# Altium PCB KEY_PLC1.PcbDoc
Units mm, origin at the board's own origin, x right, y up, seen from the top; angles counter-clockwise.
Board outline 189.8 x 21.8 mm, 2 copper layers (Top Layer, Bottom Layer), stack 1.471 mm thick; 45 components, 28 nets, 134 pads, 41 vias.
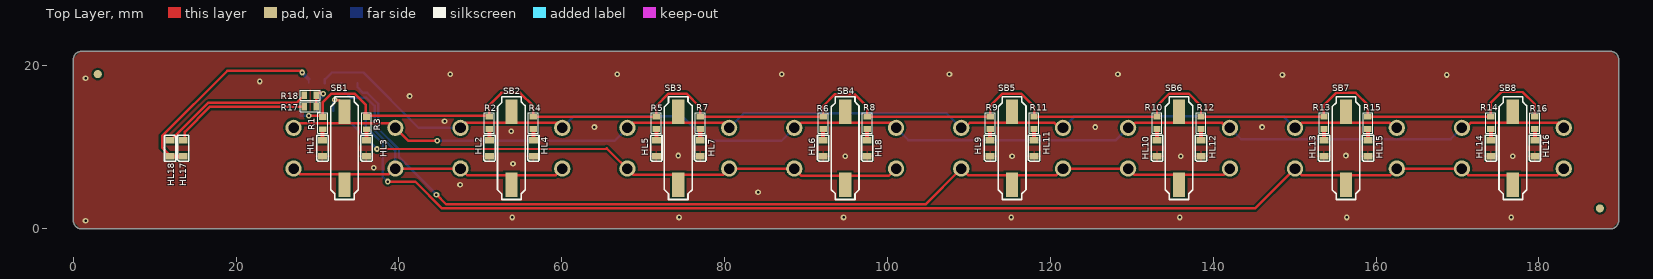
[diagram p0: Top Layer view]
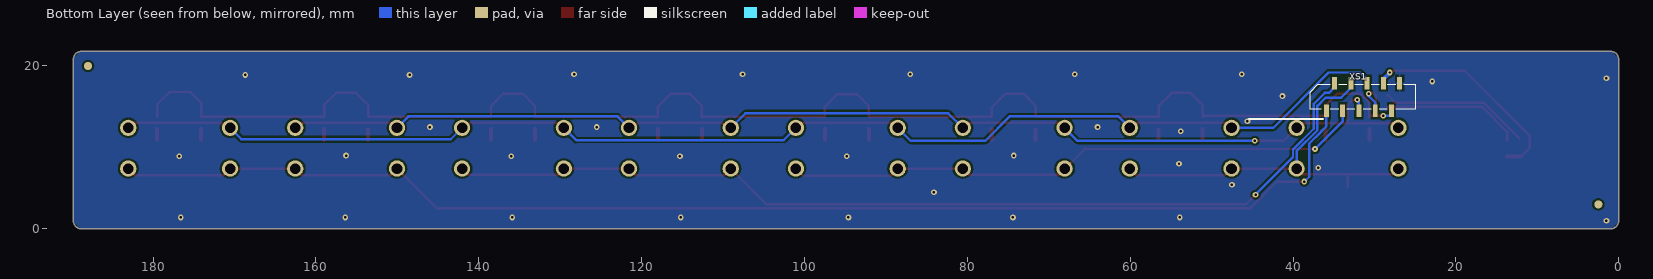
[diagram p1: Bottom Layer view, seen from below]
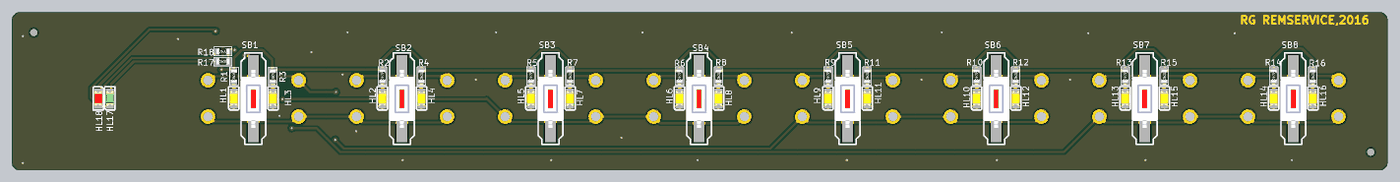
[diagram p2: 3D render of the assembled board from above, using the file's embedded part models]

## Layer stack, top to bottom
Top Solder: solder mask 0.0102, Solder Resist, Dk 3.5
Top Layer: signal copper 0.0356
Dielectric 1: dielectric 1.4, FR-4, Dk 4.8
Bottom Layer: signal copper 0.0356
Bottom Solder: solder mask 0.0102, Solder Resist, Dk 3.5

## Board outline
0,1 0,20.8 cw(c1,20.8) 1,21.8 188.8,21.8 cw(c188.8,20.8) 189.8,20.8 189.8,1 cw(c188.8,1) 188.8,0 1,0 cw(c1,1)

## Design rules (kind name [scope] priority, off if disabled: settings)
Clearance Clearance_1 [InPolygon] p1: gap=0.25
Clearance [All] p2: gap=0.152
HoleSize [All] p1: absolutevalues=TRUE maxlimit=10 minlimit=0.025 maxpercent=80.000 minpercent=20.000
HoleToHoleClearance [All] p1: gap=0.2 allowstackedmicrovias=TRUE
MinimumSolderMaskSliver [All] p1 off: minsoldermaskwidth=0.254
PlaneClearance [All] p1: clearance=0.25
PolygonConnect [(InNet('AVDD_DISP') AND IsPolygon)] p1: connectstyle=Direct reliefconductorwidth=0.254 reliefentries=4 polygonreliefangle="90 Angle" airgapwidth=0.254
PolygonConnect TOP_NETDA2-14 [InNamedPolygon('NETDA2-14')] p2: connectstyle=Direct reliefconductorwidth=0.254 reliefentries=4 polygonreliefangle="90 Angle" airgapwidth=0.254
PolygonConnect Bottom_GND [isVia vs InNet('GND')] p3: connectstyle=Direct reliefconductorwidth=0.254 reliefentries=4 polygonreliefangle="90 Angle" airgapwidth=0.254
PolygonConnect PolygonConnect_2 [All] p4: connectstyle=Relief reliefconductorwidth=0.254 reliefentries=4 polygonreliefangle="90 Angle" airgapwidth=0.254
PolygonConnect PolygonConnect_1 [isVia] p5: connectstyle=Direct reliefconductorwidth=0.254 reliefentries=4 polygonreliefangle="90 Angle" airgapwidth=0.254
RoutingVias [All] p1: holewidth=0.3 width=0.7 viastyle="Through Hole" minholewidth=0.3 minwidth=0.7 maxholewidth=5 maxwidth=7
SilkToBoardRegionClearance [All] p1 off:
SilkToSilkClearance [All] p1 off: silktosilkclearance=0.254
SilkToSolderMaskClearance [IsPad] p1 off: minsilkscreentomaskgap=0.254 clearancetoexposedcopper=TRUE
SolderMaskExpansion [All] p1: expansion=0.102
Width [All] p1: maxlimit=8 minlimit=0.15 preferedwidth=0.3
23 further rules are at their usual default settings.

## Components (designator, comment, footprint, x,y, rotation, side; value= is the part's Value field where it differs from the comment)
HL1 "BL-LS0805UYC" LED_0805 30.6,9.9 r90 top
HL2 "BL-LS0805UYC" LED_0805 51.1,9.9 r90 top
HL3 "BL-LS0805UYC" LED_0805 36,9.9 r90 top
HL4 "BL-LS0805UYC" LED_0805 56.5,9.9 r90 top
HL5 "BL-LS0805UYC" LED_0805 71.6,9.9 r90 top
HL6 "BL-LS0805UYC" LED_0805 92.1,9.9 r90 top
HL7 "BL-LS0805UYC" LED_0805 77,9.9 r90 top
HL8 "BL-LS0805UYC" LED_0805 97.5,9.9 r90 top
HL9 "BL-LS0805UYC" LED_0805 112.6,9.9 r90 top
HL10 "BL-LS0805UYC" LED_0805 133.1,9.9 r90 top
HL11 "BL-LS0805UYC" LED_0805 118,9.9 r90 top
HL12 "BL-LS0805UYC" LED_0805 138.5,9.9 r90 top
HL13 "BL-LS0805UYC" LED_0805 153.599,9.9 r90 top
HL14 "BL-LS0805UYC" LED_0805 174.1,9.9 r90 top
HL15 "BL-LS0805UYC" LED_0805 159,9.9 r90 top
HL16 "BL-LS0805UYC" LED_0805 179.5,9.9 r90 top
HL17 "BL-LS0805PGC" LED_0805G 13.5,9.9 r90 top
HL18 "BL-LS0805UHR" LED_0805R 11.9,9.9 r270 top
R1 "150" RES_0603 30.625,12.975 r90 top
R2 "150" RES_0603 51.1,13 r90 top
R3 "150" RES_0603 36,12.975 r90 top
R4 "150" RES_0603 56.5,13 r90 top
R5 "150" RES_0603 71.6,13 r90 top
R6 "150" RES_0603 92.1,13 r90 top
R7 "150" RES_0603 77,13 r90 top
R8 "150" RES_0603 97.5,13 r90 top
R9 "150" RES_0603 112.6,13 r90 top
R10 "150" RES_0603 133.1,13 r90 top
R11 "150" RES_0603 118,13 r90 top
R12 "150" RES_0603 138.5,13 r90 top
R13 "150" RES_0603 153.6,13 r90 top
R14 "150" RES_0603 174.1,13 r90 top
R15 "150" RES_0603 159,13 r90 top
R16 "150" RES_0603 179.5,13 r90 top
R17 "150" RES_0603 29.1,15 r0 top
R18 "150" RES_0603 29.1,16.4 r0 top
SB1 "1181" 1181 33.3,4.8 r90 top
SB2 "1181" 1181 53.8,4.8 r90 top
SB3 "1181" 1181 74.3,4.8 r90 top
SB4 "1181" 1181 94.8,4.8 r90 top
SB5 "1181" 1181 115.3,4.8 r90 top
SB6 "1181" 1181 135.8,4.8 r90 top
SB7 "1181" 1181 156.3,4.8 r90 top
SB8 "1181" 1181 176.8,4.8 r90 top
XS1 "52808-1070" 52808-1070 30.9,16.7 r180 bottom

## Footprints (in the part's own frame and the unit in brackets; to place one, negate y for a bottom-side part, rotate by r counter-clockwise, add the part's x,y. Pads: shape width x height; smd on the part's side, far side on the other; paste and mask are expansions set on the pad)
1181 [mm] "1181"
  rect 3x1.5 smd: 1(0.6,0) 2(9.6,0)
  silkscreen extent -1.2,-1.7 11.4,1.7, body extent 1.05,-1.8 9.05,1.8, height 2.56
52808-1070 [mm] "52808-1070 Molex"
  rect 0.6x1.55 smd: 1(-5,-2.2) 2(-4,1.2) 3(-3,-2.2) 4(-2,1.2) 5(-1,-2.2) 6(0,1.2) 7(1,-2.2) 8(2,1.2) 9(3,-2.2) 10(4,1.2)
  silkscreen extent -7,-2 6,1, body extent -7,-2.75 6,1.75, height 5.09
LED_0805 [mm]
  rect 0.8x1.1 smd: 1(-1,0) 2(1,0)
  silkscreen extent -1.6,-0.7 1.6,0.7, body extent -1.01,-0.62 1.01,0.63, height 1.1
LED_0805G [mm]
  rect 0.8x1.1 smd: 1(-1,0) 2(1,0)
  silkscreen extent -1.6,-0.7 1.6,0.7, body extent -1.01,-0.62 1.01,0.63, height 1.1
LED_0805R [mm] "RED LED 0805"
  rect 0.8x1.1 smd: 1(-1,0) 2(1,0)
  silkscreen extent -1.6,-0.7 1.6,0.7, body extent -1.01,-0.62 1.01,0.63, height 1.1
RES_0603 [mm] "RES and IND"
  rect 0.7x0.9 smd: 1(-0.75,0) 2(0.75,0)
  silkscreen extent -1.25,-0.6 1.25,0.6, body extent -0.85,-0.4 0.85,0.4, height 0.56

## Part data
R1 R2 R3 R4 R5 R6 R7 R8 R9 R10 R11 R12 R13 R14 R15 R16 R17 R18: library part Res_0603, "0603, 150"
SB1 SB2 SB3 SB4 SB5 SB6 SB7 SB8: "PS580N button"
XS1: "MOLEX 10-way connector"

## Free pads (board coordinates)
  round 1 smd far side: 1(2.5,3) 1(188,20)
  round 1 smd: 1(3,19) 1(187.5,2.5)
  round 2 hole 1.3: 1(27.05,12.4) 1(47.55,12.4) 1(68.05,7.4) 1(68.05,12.4) 1(88.55,12.4) 1(109.05,12.4) 1(129.55,12.4) 1(150.05,12.4) 1(170.55,12.4) 2(39.55,12.4) 2(60.05,12.4) 2(80.55,12.4) 2(101.05,12.4) 2(121.55,12.4) 2(142.05,12.4) 2(162.55,12.4) 2(183.05,12.4) 3(27.05,7.4) 3(47.55,7.4) 3(88.55,7.4) 3(109.05,7.4) 3(129.55,7.4) 3(150.05,7.4) 3(170.55,7.4) 4(39.55,7.4) 4(60.05,7.4) 4(80.55,7.4) 4(101.05,7.4) 4(121.55,7.4) 4(142.05,7.4) 4(162.55,7.4) 4(183.05,7.4)

## Via types
v1: diameter 0.7, hole 0.3, Top Layer to Bottom Layer, tented both sides, 41 vias

## Nets (pads, with @x,y where several pads share a name; then routed paths per layer and width w, separated by ;. In a path a pad name is that pad's centre, name@x,y a point inside that pad or via, vN(x,y) a via of type N, cw(c..) or ccw(c..) an arc to the next point about the centre after c; other vN are vias at no path point)
GND: HL1.1 HL2.1 HL3.1 HL4.1 HL5.1 HL6.1 HL7.1 HL8.1 HL9.1 HL10.1 HL11.1 HL12.1 HL13.1 HL14.1 HL15.1 HL16.1 XS1.10
  other v1: 1.5,1 53.9,1.4 74.4,1.4 94.6,1.4 115.2,1.4 135.9,1.4 156.4,1.4 176.6,1.4 84.1,4.5 47.5,5.4 36.9,7.5 54,8 94.8,8.9 115.3,8.9 136,8.9 176.8,8.9 74.3,9 156.3,9 53.8,12 64,12.5 125.5,12.5 146,12.5 45.6,13.2 41.3,16.3 22.9,18.1 1.5,18.5 148.5,18.9 168.7,18.9 46.3,19 66.8,19 87,19 107.6,19 128.3,19
NetHL1_2: HL1.2 R1.1 | length 1.3
  Top Layer w0.5: HL1.2@30.625,10.925 R1.1
NetHL2_2: HL2.2 R2.1 | length 1.3
  Top Layer w0.5: HL2.2 R2.1@51.1,12.225
NetHL3_2: HL3.2 R3.1 | length 1.3
  Top Layer w0.5: HL3.2@36.025,10.925 R3.1@36.025,12.2
NetHL4_2: HL4.2 R4.1 | length 1.3
  Top Layer w0.5: HL4.2 R4.1@56.5,12.2
NetHL5_2: HL5.2 R5.1 | length 1.3
  Top Layer w0.5: HL5.2 R5.1@71.6,12.2
NetHL6_2: HL6.2 R6.1 | length 1.3
  Top Layer w0.5: HL6.2 R6.1
NetHL7_2: HL7.2 R7.1 | length 1.3
  Top Layer w0.5: HL7.2 R7.1
NetHL8_2: HL8.2 R8.1 | length 1.3
  Top Layer w0.5: HL8.2 R8.1
NetHL9_2: HL9.2 R9.1 | length 1.3
  Top Layer w0.5: HL9.2@112.6,10.9 R9.1
NetHL10_2: HL10.2 R10.1 | length 1.3
  Top Layer w0.5: HL10.2 R10.1
NetHL11_2: HL11.2 R11.1 | length 1.3
  Top Layer w0.5: HL11.2 R11.1
NetHL12_2: HL12.2 R12.1 | length 1.3
  Top Layer w0.5: HL12.2 R12.1
NetHL13_2: HL13.2 R13.1 | length 1.3
  Top Layer w0.5: HL13.2 R13.1
NetHL14_2: HL14.2 R14.1 | length 1.3
  Top Layer w0.5: HL14.2 R14.1
NetHL15_2: HL15.2 R15.1 | length 1.3
  Top Layer w0.5: HL15.2 R15.1
NetHL16_2: HL16.2 R16.1 | length 1.3
  Top Layer w0.5: HL16.2 R16.1
NetHL17_1: HL17.1 HL18.2 XS1.8 | length 26.8
  Top Layer w0.3: HL18.2@12,8.9 10.9,10 10.9,11.4 18.9,19.4 v1@28.1,19.4
  Top Layer w0.5: HL18.2@12,8.9 HL17.1@13.7,8.9
  Bottom Layer w0.2: v1@28.1,19.1 v1@28.2,19.1 ; XS1.8@28.9,17.875 XS1.8@28.9,18.4
  Bottom Layer w0.5: v1@28.2,19.1 XS1.8@28.9,18.4
  other v1: 28.1,19.2
NetHL17_2: HL17.2 R17.1 | length 17.2
  Top Layer w0.2: HL17.2@13.7,10.9 HL17.2@13.877,11.077
  Top Layer w0.3: HL17.2@13.7,10.9 13.7,11.9 16.8,15 R17.1
NetHL18_1: HL18.1 R18.1 | length 18.3
  Top Layer w0.3: HL18.1@12.2,11.1 16.6,15.5 27.45,15.5 R18.1
NetR17_2: R17.2 R18.2 XS1.7 | length 4.9
  Top Layer w0.3: R17.2 R18.2 30.15,16.7 30.6,16.7 v1(30.7,16.6) v1@30.7,16.5
  Bottom Layer w0.3: XS1.7 29.9,15.5 30.7,16.3 v1(30.7,16.6)
NetSB1_1: pad.3@27.05,7.4 pad.3@47.55,7.4 pad.4@39.55,7.4 pad.4@60.05,7.4 SB1.1 SB2.1 XS1.4 | length 50.2
  Top Layer w0.2: pad.3@27.05,7.4 pad.3@27.15,7.4 ; pad.4@39.45,7.4 pad.4@39.55,7.4
  Top Layer w0.3: pad.3@27.15,7.4 27.825,6.725 38.775,6.725 pad.4@39.45,7.4 ; SB1.1@33.3,5.1 SB1.1@33.3,6.7 ; pad.4@39.55,7.4 47.55,7.4 48.375,6.575 59.225,6.575 pad.4@60.05,7.4
  Bottom Layer w0.3: XS1.4 32.9,17.3 34.1,16.1 36,16.1 37,15.1 37,12.1 39.55,9.55 pad.4@39.55,7.4
NetSB1_2: pad.1@27.05,12.4 pad.1@68.05,12.4 pad.1@109.05,12.4 pad.1@150.05,12.4 pad.2@39.55,12.4 pad.2@80.55,12.4 pad.2@121.55,12.4 pad.2@162.55,12.4 SB1.2 SB3.2 SB5.2 SB7.2 XS1.5 | length 146.3
  Top Layer w0.3: pad.1@27.2,12.975 pad.2@39.7,12.975 ; v1(32.1,15.85) 32.15,15.8 32.7,15.8 33.3,15.2 SB1.2 SB1.2@33.3,13 ; pad.2@39.55,12.4 41.15,10.8 v1(44.7,10.8) ; pad.1@68.05,12.4 68.65,13 79.95,13 pad.2@80.55,12.4 ; pad.1@109.05,12.4 109.5,12.4 110.1,13 120.5,13 121.1,12.4 pad.2@121.55,12.4 ; pad.1@150.05,12.4 150.3,12.4 150.9,13 161.7,13 162.3,12.4 pad.2@162.55,12.4
  Bottom Layer w0.3: XS1.5 31.9,15.65 v1(32.1,15.85) ; v1(44.7,10.8) 66.45,10.8 pad.1@68.05,12.4 ; pad.2@80.55,12.4 82.35,14.2 107.25,14.2 pad.1@109.05,12.4 ; pad.2@121.55,12.4 122.95,13.8 148.65,13.8 pad.1@150.05,12.4
  Bottom Layer w0.5: pad.2@39.4,12.55 pad.2@39.55,12.4
NetSB2_2: pad.1@47.55,12.4 pad.1@88.55,12.4 pad.1@129.55,12.4 pad.1@170.55,12.4 pad.2@60.05,12.4 pad.2@101.05,12.4 pad.2@142.05,12.4 pad.2@183.05,12.4 SB2.2 SB4.2 SB6.2 SB8.2 XS1.6 | length 162.7
  Top Layer w0.3: pad.1@47.55,12.4 48.15,13 59.45,13 pad.2@60.05,12.4 ; pad.1@88.55,12.4 88.8,12.4 89.4,13 100.45,13 pad.2@101.05,12.4 ; pad.1@129.55,12.4 129.8,12.4 130.4,13 141.1,13 141.7,12.4 pad.2@142.05,12.4 ; pad.1@170.55,12.4 171,12.4 171.6,13 182.45,13 pad.2@183.05,12.4
  Bottom Layer w0.3: XS1.6@30.9,17.875 30.9,18.35 31.75,19.2 35.625,19.2 42.425,12.4 pad.1@47.55,12.4 ; pad.2@60.05,12.4 61.45,13.8 74.8,13.8 77.8,10.8 86.95,10.8 pad.1@88.55,12.4 ; pad.2@101.05,12.4 102.55,10.9 128.05,10.9 pad.1@129.55,12.4 ; pad.2@142.05,12.4 143.45,11 169.15,11 pad.1@170.55,12.4
NetSB3_1: pad.1@68.05,7.4 pad.3@88.55,7.4 pad.4@80.55,7.4 pad.4@101.05,7.4 SB3.1 SB4.1 XS1.3 | length 72.3
  Top Layer w0.3: v1(37.3,9.8) 65.4,9.8 65.5,9.9 68.75,6.65 79.8,6.65 80.55,7.4 88.55,7.4 89.45,6.5 100.15,6.5 pad.4@101.05,7.4
  Bottom Layer w0.3: XS1.3 33.9,13.2 v1(37.3,9.8)
NetSB5_1: pad.3@109.05,7.4 pad.3@129.55,7.4 pad.4@121.55,7.4 pad.4@142.05,7.4 SB5.1 SB6.1 XS1.2 | length 119.1
  Top Layer w0.3: v1(44.6,4.2) 45.8,3 104.65,3 109.05,7.4 109.1,7.4 109.9,6.6 120.75,6.6 121.55,7.4 129.55,7.4 130.3,6.65 141.3,6.65 pad.4@142.05,7.4
  Bottom Layer w0.3: XS1.2 34.9,17.4 35.6,16.7 36.1,16.7 37.452,15.348 37.452,12.287 40.002,9.737 40.002,8.798 v1(44.6,4.2)
NetSB7_1: pad.3@150.05,7.4 pad.3@170.55,7.4 pad.4@162.55,7.4 pad.4@183.05,7.4 SB7.1 SB8.1 XS1.1 | length 159
  Top Layer w0.3: v1(38.6,5.8) 42,5.8 45.3,2.5 145.15,2.5 150.05,7.4 150.85,6.6 161.75,6.6 162.55,7.4 170.55,7.4 171.35,6.6 182.25,6.6 pad.4@183.05,7.4
  Bottom Layer w0.3: XS1.1 35.9,12.6 36.548,11.952 36.548,11.913 38,10.46 38,6.4 v1(38.6,5.8)
VL: R1.2 R2.2 R3.2 R4.2 R5.2 R6.2 R7.2 R8.2 R9.2 R10.2 R11.2 R12.2 R13.2 R14.2 R15.2 R16.2 XS1.9 | length 185
  Top Layer w0.2: R3.2@35.9,13.625 R3.2@36.025,13.5
  Top Layer w0.3: v1(28.9,13.9) 30.45,13.9 R1.2 30.625,15.525 31.7,16.6 34.55,16.6 35.9,15.25 35.9,14.2 ; R3.2@36,13.9 R2.2@51.1,13.9 ; R2.2@51.1,13.725 51.1,15.225 52.575,16.7 54.875,16.7 56.5,15.075 R4.2 R5.2 71.6,15.1 73.1,16.6 75.3,16.6 77,14.9 R7.2 R6.2 92.1,15.1 93.5,16.5 96,16.5 97.5,15 R8.2 R9.2 112.6,15.1 114.1,16.6 116.4,16.6 118,15 R11.2 R10.2 133.1,15.1 134.6,16.6 137,16.6 138.5,15.1 R12.2 R13.2 153.6,15.2 155.1,16.7 157.5,16.7 159,15.2 R15.2 R14.2 174.1,15.5 175.4,16.8 178,16.8 179.5,15.3 R16.2
  Top Layer w0.5: R3.2@35.9,13.625 35.9,14.2
  Bottom Layer w0.3: XS1.9 27.9,14 27.95,13.95 27.9,13.9 v1(28.9,13.9)

## Polygon pours and split planes (outlines as drawn)
GND on Bottom Layer "Bottom Layer-No Net" (solid, remove dead copper, pour order 0): 0.1,20.1 0.1,20.9 0.1,21 0.2,21.1 0.3,21.2 0.4,21.3 0.8,21.7 1.4,21.7 16.4,21.7 189,21.7 189.7,21 189.7,0.8 189,0.1 179,0.1 0.8,0.1 0.5,0.4 0.1,0.8
GND on Top Layer "Bottom Layer-No Net" (solid, remove dead copper, pour order 2): 0.1,0.8 0.1,21 0.8,21.7 2.8,21.7 189,21.7 189.7,21 189.7,16.7 189.7,0.8 189,0.1 172.6,0.1 152.3,0.1 0.8,0.1

## Silkscreen, mask and mechanical layers (free items; w line width, h text height)
Bottom Overlay:
  lines w0.254: 36.35,13.475 45.4,13.475
Top Solder:
  text "RG REMSERVICE,2016" at 169.3,20.2 h1.1
Mechanical 1:
  the board outline again, w0.1